# EAGLE board POVRotor (EAGLE 9.5.1)
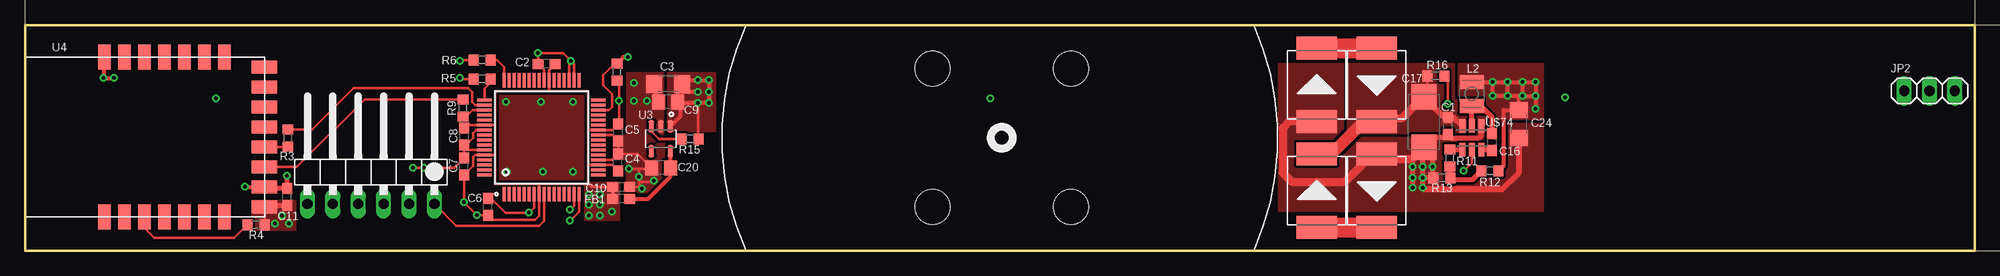
[diagram p0: board, top side]
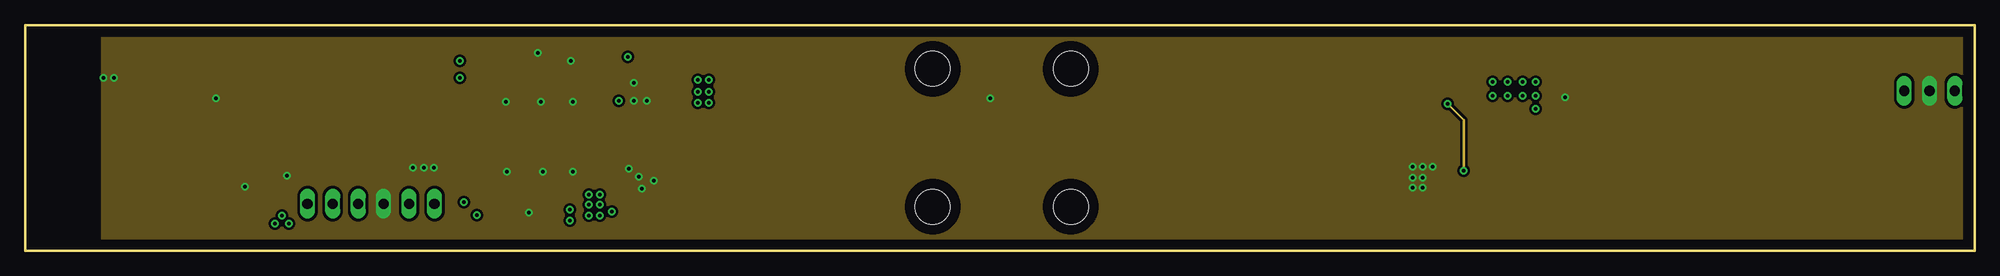
[diagram p1: board, inner layer GND]
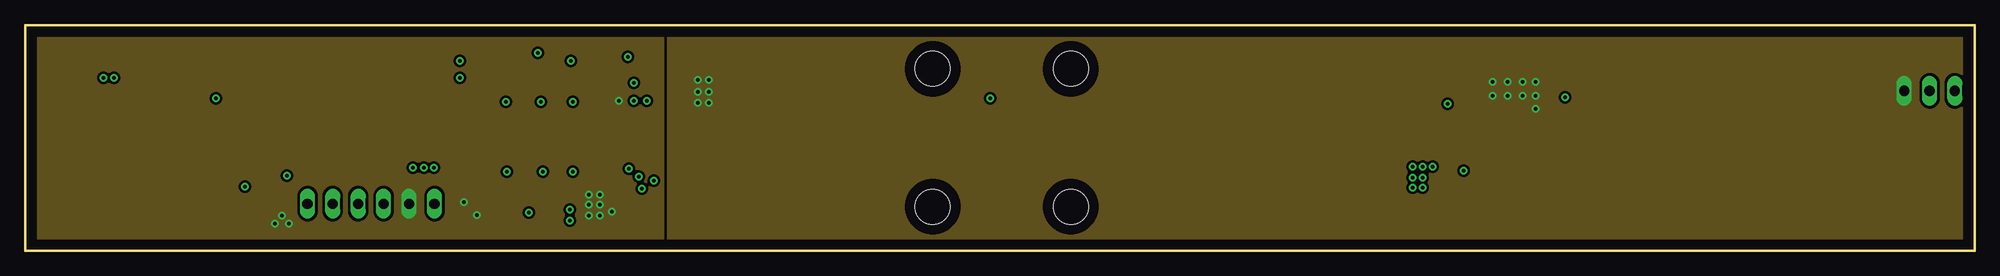
[diagram p2: board, inner layer 5V]
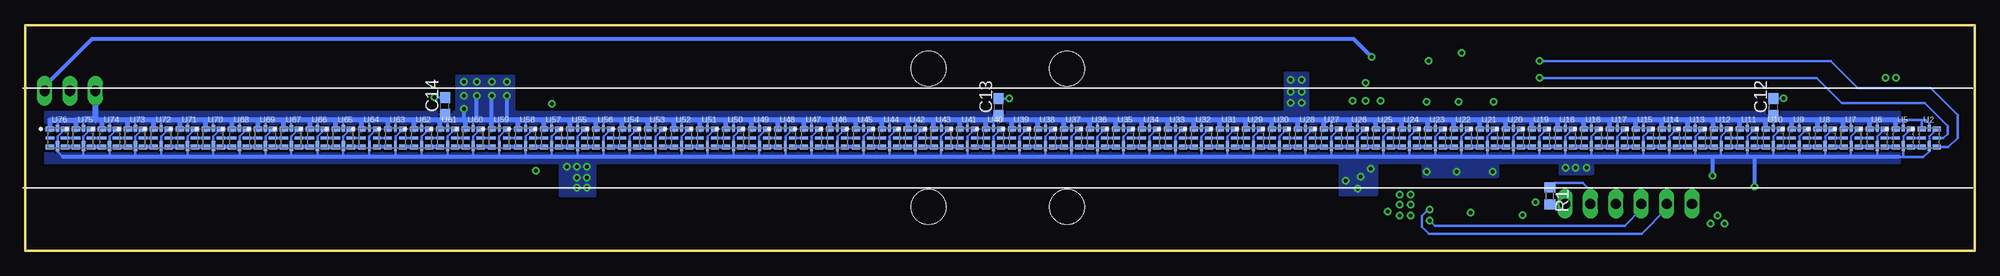
[diagram p3: board, bottom side, seen from below]

Size 195 x 22.6 mm. Coordinates in mm from the lower left corner, seen from the top.
Outline: 0,22.6 195,22.6 195,0 0,0 0,22.6
Copper layers (1+2*15+16): Top 0.035mm / dielectric 1.5mm / GND 0.035mm / dielectric 0.15mm / 5V 0.035mm / dielectric 0.2mm / Bottom 0.035mm
Design rules "default *": minimum track width 0.1mm, minimum drill 12mil, track to track 4mil, track to pad 4mil, pad to pad 4mil, via to via 4mil, smd to smd 4mil, copper to edge 40mil, drill to drill 8mil, minimum pad ring 10mil, minimum via ring 8mil, stop-mask expansion 4mil, vias tented up to drill 0mil, thermal gap 10mil
Holes 3.51 mm at 104.61,18.21 90.79,4.39 104.61,4.39 90.79,18.21

## Footprints (pad centres in the part's own frame; a part is rotated, then mirrored left to right if it is on the bottom)
C0603 = smd 1.1 x 1: 1 -0.85,0; 2 0.85,0
C1206 = smd 1.6 x 1.8: 1 -1.4,0; 2 1.4,0
C0805 = smd 1.3 x 1.5: 1 -0.95,0; 2 0.95,0
C/6032-28R = smd 2.55 x 2.5: + 2.525,0; - -2.525,0
DO-214AB = smd 2.286 x 4.064: 1 -3.683,0; 2 3.683,0
0603 = smd 1.1 x 1: 1 -0.85,0; 2 0.85,0
1X06/90 = drill 1.016 long: 1 -6.35,-3.81; 2 -3.81,-3.81; 3 -1.27,-3.81; 4 1.27,-3.81; 5 3.81,-3.81; 6 6.35,-3.81
1X03 = drill 1.016 long: 1 -2.54,0; 2 0,0; 3 2.54,0
L2825P = smd 1.4 x 2.4: 1 -1.2,0; 2 1.2,0
R0603 = smd 1 x 1.1: 1 -0.85,0; 2 0.85,0
QFP50P1200X1200X120-64N = smd 1.45 x 0.3: 1 -5.7,3.75; 2 -5.7,3.25; 3 -5.7,2.75; 4 -5.7,2.25; 5 -5.7,1.75; 6 -5.7,1.25; 7 -5.7,0.75; 8 -5.7,0.25; 9 -5.7,-0.25; 10 -5.7,-0.75; 11 -5.7,-1.25; 12 -5.7,-1.75; 13 -5.7,-2.25; 14 -5.7,-2.75; 15 -5.7,-3.25; 16 -5.7,-3.75; 33 5.7,-3.75; 34 5.7,-3.25; 35 5.7,-2.75; 36 5.7,-2.25; 37 5.7,-1.75; 38 5.7,-1.25; 39 5.7,-0.75; 40 5.7,-0.25; 41 5.7,0.25; 42 5.7,0.75; 43 5.7,1.25; 44 5.7,1.75; 45 5.7,2.25; 46 5.7,2.75; 47 5.7,3.25; 48 5.7,3.75 | smd 0.3 x 1.45: 17 -3.75,-5.7; 18 -3.25,-5.7; 19 -2.75,-5.7; 20 -2.25,-5.7; 21 -1.75,-5.7; 22 -1.25,-5.7; 23 -0.75,-5.7; 24 -0.25,-5.7; 25 0.25,-5.7; 26 0.75,-5.7; 27 1.25,-5.7; 28 1.75,-5.7; 29 2.25,-5.7; 30 2.75,-5.7; 31 3.25,-5.7; 32 3.75,-5.7; 49 3.75,5.7; 50 3.25,5.7; 51 2.75,5.7; 52 2.25,5.7; 53 1.75,5.7; 54 1.25,5.7; 55 0.75,5.7; 56 0.25,5.7; 57 -0.25,5.7; 58 -0.75,5.7; 59 -1.25,5.7; 60 -1.75,5.7; 61 -2.25,5.7; 62 -2.75,5.7; 63 -3.25,5.7; 64 -3.75,5.7
LED_3341 = smd 0.8 x 0.5: 1 -0.75,0.9; 3 -0.75,-0.9; 4 0.75,-0.9; 6 0.75,0.9 | smd 0.8 x 0.3: 2 -0.75,0; 5 0.75,0 | smd 0.3 x 1: 7 0,-0.83 | smd 0.3 x 0.66: 8 0,0.965
SOT95P280X145-5N = smd 1.21 x 0.59: 1 -1.255,0.95; 2 -1.255,0; 3 -1.255,-0.95; 4 1.255,-0.95; 5 1.255,0.95
EMB1061 = smd 2.54 x 1.27: P$1 -7.62,5.84; P$2 -7.62,3.84; P$3 -7.62,1.84; P$4 -7.62,-0.16; P$5 -7.62,-2.16; P$6 -7.62,-4.16; P$7 -7.62,-6.16; P$16 8.38,-6.16; P$17 8.38,-4.16; P$18 8.38,-2.16; P$19 8.38,-0.16; P$20 8.38,1.84; P$21 8.38,3.84; P$22 8.38,5.84 | smd 1.27 x 2.54: P$8 -6.62,-10.16; P$9 -4.62,-10.16; P$10 -2.62,-10.16; P$11 -0.62,-10.16; P$12 1.38,-10.16; P$13 3.38,-10.16; P$14 5.38,-10.16; P$15 7.38,-10.16
SOT95P280X140-6N = smd 1.35 x 0.6: 1 -1.185,0.95; 2 -1.185,0; 3 -1.185,-0.95; 4 1.185,-0.95; 5 1.185,0; 6 1.185,0.95

## Placement (x,y rotation side)
C1  0.1uF  [C0603]  142.3,12.5 270 top
C2  0.1uF  [C0603]  52.15,18.7 180 top
C3  10uF  [C1206]  64.3,16.7 180 top
C4  0.1uF  [C0603]  59.3,8.85 90 top
C5  0.1uF  [C0603]  59.3,11.85 270 top
C6  0.1uF  [C0603]  46.3,4.4 90 top
C7  0.1uF  [C0603]  43.9,8.45 90 top
C8  0.1uF  [C0603]  43.9,11.45 270 top
C9  [C0805]  64.3,14.9 180 top
C10  0.1uF  [C0603]  59.6,6.4 0 top
C11  0.1uF  [C0603]  26.2,5.4 90 top
C12  0.1uF  [C0603]  20.1,14.4 90 bottom
C13  0.1uF  [C0603]  97.6,14.4 90 bottom
C14  0.1uF  [C0603]  153,14.5 90 bottom
C16  0.1uF  [C0603]  146.7,10.9 270 top
C17  [C/6032-28R]  139.9,12.9 90 top
C20  1uF  [C0805]  63.6,8.3 180 top
C24  10uF  [C1206]  149.4,12.7 270 top
D2  SMD-DIODE-SCHOTTKY-40V-3A(DO-214AB)  [DO-214AB]  129.2,6 90 top
D3  SMD-DIODE-SCHOTTKY-40V-3A(DO-214AB)  [DO-214AB]  135.2,16.6 270 top
D4  SMD-DIODE-SCHOTTKY-40V-3A(DO-214AB)  [DO-214AB]  129.2,16.6 90 top
D5  SMD-DIODE-SCHOTTKY-40V-3A(DO-214AB)  [DO-214AB]  135.2,6 270 top
FB1  30Ω/1.8A  [0603]  59.6,5.2 180 top
JP1  [1X06/90]  34.6,8.5 0 top
JP2  [1X03]  190.5,16 0 top
L2  4.7uH  [L2825P]  144.7,15.7 270 top
R1  [R0603]  42.5,5.5 270 bottom
R2  [R0603]  59.2,17.9 90 top
R3  [R0603]  26.3,11.3 270 top
R4  [R0603]  23.1,2.6 180 top
R5  [R0603]  45.7,17.2 180 top
R6  [R0603]  45.7,19.1 180 top
R9  [R0603]  43.8,14.3 90 top
R11  75k  [R0603]  142.5,9.3 270 top
R12  41k  [R0603]  146.5,8 0 top
R13  7.6k  [R0603]  141.7,7.3 0 top
R15  75k  [R0603]  66.5,11.2 180 top
R16  20k  [R0603]  141.1,17.5 180 top
U1  PIC32MZ2048EFH064-I/PT  [QFP50P1200X1200X120-64N]  51.65,11.35 90 top
U2  3341  [LED_3341]  4.55,11.3 0 bottom
U3  TLV75533PDBVR  [SOT95P280X145-5N]  63.6,11.2 270 top
U4  EMB1061  [EMB1061]  13.8,11 90 top
U5  3341  [LED_3341]  7.15,11.3 0 bottom
U6  3341  [LED_3341]  9.75,11.3 0 bottom
U7  3341  [LED_3341]  12.35,11.3 0 bottom
U8  3341  [LED_3341]  14.95,11.3 0 bottom
U9  3341  [LED_3341]  17.55,11.3 0 bottom
U10  3341  [LED_3341]  20.15,11.3 0 bottom
U11  3341  [LED_3341]  22.75,11.3 0 bottom
U12  3341  [LED_3341]  25.35,11.3 0 bottom
U13  3341  [LED_3341]  27.95,11.3 0 bottom
U14  3341  [LED_3341]  30.55,11.3 0 bottom
U15  3341  [LED_3341]  33.15,11.3 0 bottom
U16  3341  [LED_3341]  38.35,11.3 0 bottom
U17  3341  [LED_3341]  35.75,11.3 0 bottom
U18  3341  [LED_3341]  40.95,11.3 0 bottom
U19  3341  [LED_3341]  43.55,11.3 0 bottom
U20  3341  [LED_3341]  46.15,11.3 0 bottom
U21  3341  [LED_3341]  48.75,11.3 0 bottom
U22  3341  [LED_3341]  51.35,11.3 0 bottom
U23  3341  [LED_3341]  53.95,11.3 0 bottom
U24  3341  [LED_3341]  56.55,11.3 0 bottom
U25  3341  [LED_3341]  59.15,11.3 0 bottom
U26  3341  [LED_3341]  61.75,11.3 0 bottom
U27  3341  [LED_3341]  64.35,11.3 0 bottom
U28  3341  [LED_3341]  66.95,11.3 0 bottom
U29  3341  [LED_3341]  72.15,11.3 0 bottom
U30  3341  [LED_3341]  69.55,11.3 0 bottom
U31  3341  [LED_3341]  74.75,11.3 0 bottom
U32  3341  [LED_3341]  77.35,11.3 0 bottom
U33  3341  [LED_3341]  79.95,11.3 0 bottom
U34  3341  [LED_3341]  82.55,11.3 0 bottom
U35  3341  [LED_3341]  85.15,11.3 0 bottom
U36  3341  [LED_3341]  87.75,11.3 0 bottom
U37  3341  [LED_3341]  90.35,11.3 0 bottom
U38  3341  [LED_3341]  92.95,11.3 0 bottom
U39  3341  [LED_3341]  95.55,11.3 0 bottom
U40  3341  [LED_3341]  98.15,11.3 0 bottom
U41  3341  [LED_3341]  100.75,11.3 0 bottom
U42  3341  [LED_3341]  105.95,11.3 0 bottom
U43  3341  [LED_3341]  103.35,11.3 0 bottom
U44  3341  [LED_3341]  108.55,11.3 0 bottom
U45  3341  [LED_3341]  111.15,11.3 0 bottom
U46  3341  [LED_3341]  113.75,11.3 0 bottom
U47  3341  [LED_3341]  116.35,11.3 0 bottom
U48  3341  [LED_3341]  118.95,11.3 0 bottom
U49  3341  [LED_3341]  121.55,11.3 0 bottom
U50  3341  [LED_3341]  124.15,11.3 0 bottom
U51  3341  [LED_3341]  126.75,11.3 0 bottom
U52  3341  [LED_3341]  129.35,11.3 0 bottom
U53  3341  [LED_3341]  131.95,11.3 0 bottom
U54  3341  [LED_3341]  134.55,11.3 0 bottom
U55  3341  [LED_3341]  139.75,11.3 0 bottom
U56  3341  [LED_3341]  137.15,11.3 0 bottom
U57  3341  [LED_3341]  142.35,11.3 0 bottom
U58  3341  [LED_3341]  144.95,11.3 0 bottom
U59  3341  [LED_3341]  147.55,11.3 0 bottom
U60  3341  [LED_3341]  150.15,11.3 0 bottom
U61  3341  [LED_3341]  152.75,11.3 0 bottom
U62  3341  [LED_3341]  155.35,11.3 0 bottom
U63  3341  [LED_3341]  157.95,11.3 0 bottom
U64  3341  [LED_3341]  160.55,11.3 0 bottom
U65  3341  [LED_3341]  163.15,11.3 0 bottom
U66  3341  [LED_3341]  165.75,11.3 0 bottom
U67  3341  [LED_3341]  168.35,11.3 0 bottom
U68  3341  [LED_3341]  173.55,11.3 0 bottom
U69  3341  [LED_3341]  170.95,11.3 0 bottom
U70  3341  [LED_3341]  176.15,11.3 0 bottom
U71  3341  [LED_3341]  178.75,11.3 0 bottom
U72  3341  [LED_3341]  181.35,11.3 0 bottom
U73  3341  [LED_3341]  183.95,11.3 0 bottom
U74  3341  [LED_3341]  186.55,11.3 0 bottom
U75  3341  [LED_3341]  189.15,11.3 0 bottom
U76  3341  [LED_3341]  191.75,11.3 0 bottom
U$74  AP65211A  [SOT95P280X140-6N]  144.7,11.3 270 top

## Library data of the parts
C1-C8 C10-C14 C16 C17 C20 C24 = rcl; SPICEPREFIX: C
C9 R1-R6 R9 = resistor
D2-D5 = SMD-DIODE-SCHOTTKY-40V-3A_DO-214AB_; AVAILABILITY: Good; DESCRIPTION: Rectifier%2C Schottky%3B DO-214AB%3B 3.0A IF%3B 0.75V%3B 40V%3B 100A IFRM%3B 10000V/us%3B 1000pF; MF: Vishay; MP: SS34-E3/57T; PACKAGE: DO-214 Vishay; PRICE: 0.24 USD
FB1 = SparkFun-Coils; PROD_ID: NDUC-07859
JP1 JP2 = pinhead
L2 = rcl; SPICEPREFIX: L
R11-R13 R15 R16 = rcl; SPICEPREFIX: R
U1 = PIC32MZ2048EFH064-I_PT; AVAILABILITY: Good; DESCRIPTION: PIC32MZ Series 2 MB Flash 512 kB RAM 200 MHz 32-Bit Microcontroller - TQFP-64; MF: Microchip; MP: PIC32MZ2048EFH064-I/PT; PACKAGE: TQFP-64 Microchip; PRICE: 11.29 USD
U2 U5-U76 = APA102; AVAILABILITY: Unavailable; DESCRIPTION: APA102-2020-256-8 is a type ic for the three-color RGB Diming control strip and string.; MF: Adafruit Industries; MP: APA-102-2020-256-8; PACKAGE: SOIC-20 Adafruit Industries; PRICE: None
U3 = TLV75533PDBVR; AVAILABILITY: Unavailable; DESCRIPTION: 500mA Low-IQ Small-Size Low-Dropout _LDO_ Regulator 5-SOT-23 -40 to 125; MF: Texas Instruments; MP: TLV75533PDBVR; PACKAGE: SOT-23 Texas Instruments; PRICE: None
U4 = EMB1061; AVAILABILITY: Unavailable; DESCRIPTION: u-Blox M8 Gnss Antenna Module; MF: U-Blox America; MP: SAM-M8Q; PACKAGE: SMD-20 U-Blox America; PRICE: None
U$74 = SOT95P280X140-6N

## Nets
+3V3: C2.1 C4.1 C5.1 C6.1 C7.1 C8.1 C10.1 C11.1 FB1.2 JP1.5 R1.1 R2.1 R4.1 U1.8 U1.19 U1.26 U1.39 U1.54 U1.60 U4.P$8
+5V: C3.1 C9.1 C12.1 C13.1 C14.1 C24.1 JP2.1 L2.1 R12.2 R15.1 U2.1 U2.8 U3.1 U5.1 U5.8 U6.1 U6.8 U7.1 U7.8 U8.1 U8.8 U9.1 U9.8 U10.1 U10.8 U11.1 U11.8 U12.1 U12.8 U13.1 U13.8 U14.1 U14.8 U15.1 U15.8 U16.1 U16.8 U17.1 U17.8 U18.1 U18.8 U19.1 U19.8 U20.1 U20.8 U21.1 U21.8 U22.1 U22.8 U23.1 U23.8 U24.1 U24.8 U25.1 U25.8 U26.1 U26.8 U27.1 U27.8 U28.1 U28.8 U29.1 U29.8 U30.1 U30.8 U31.1 U31.8 U32.1 U32.8 U33.1 U33.8 U34.1 U34.8 U35.1 U35.8 U36.1 U36.8 U37.1 U37.8 U38.1 U38.8 U39.1 U39.8 U40.1 U40.8 U41.1 U41.8 U42.1 U42.8 U43.1 U43.8 U44.1 U44.8 U45.1 U45.8 U46.1 U46.8 U47.1 U47.8 U48.1 U48.8 U49.1 U49.8 U50.1 U50.8 U51.1 U51.8 U52.1 U52.8 U53.1 U53.8 U54.1 U54.8 U55.1 U55.8 U56.1 U56.8 U57.1 U57.8 U58.1 U58.8 U59.1 U59.8 U60.1 U60.8 U61.1 U61.8 U62.1 U62.8 U63.1 U63.8 U64.1 U64.8 U65.1 U65.8 U66.1 U66.8 U67.1 U67.8 U68.1 U68.8 U69.1 U69.8 U70.1 U70.8 U71.1 U71.8 U72.1 U72.8 U73.1 U73.8 U74.1 U74.8 U75.1 U75.8 U76.1 U76.8
+15V: C1.1 C17.+ D2.2 D3.2 R16.2 U$74.3
BLE_RX: R3.2 U4.P$11
BLE_TX: R9.2 U4.P$10
CKI_1: R5.2 U2.5
GND: C1.2 C2.2 C3.2 C4.2 C5.2 C6.2 C7.2 C8.2 C9.2 C10.2 C11.2 C12.2 C13.2 C14.2 C17.- C20.2 C24.2 D4.1 D5.1 JP1.4 JP2.2 R13.1 U1.7 U1.20 U1.25 U1.34 U1.35 U1.40 U1.55 U1.59 U2.6 U2.7 U3.2 U4.P$9 U4.P$22 U5.6 U5.7 U6.6 U6.7 U7.6 U7.7 U8.6 U8.7 U9.6 U9.7 U10.6 U10.7 U11.6 U11.7 U12.6 U12.7 U13.6 U13.7 U14.6 U14.7 U15.6 U15.7 U16.6 U16.7 U17.6 U17.7 U18.6 U18.7 U19.6 U19.7 U20.6 U20.7 U21.6 U21.7 U22.6 U22.7 U23.6 U23.7 U24.6 U24.7 U25.6 U25.7 U26.6 U26.7 U27.6 U27.7 U28.6 U28.7 U29.6 U29.7 U30.6 U30.7 U31.6 U31.7 U32.6 U32.7 U33.6 U33.7 U34.6 U34.7 U35.6 U35.7 U36.6 U36.7 U37.6 U37.7 U38.6 U38.7 U39.6 U39.7 U40.6 U40.7 U41.6 U41.7 U42.6 U42.7 U43.6 U43.7 U44.6 U44.7 U45.6 U45.7 U46.6 U46.7 U47.6 U47.7 U48.6 U48.7 U49.6 U49.7 U50.6 U50.7 U51.6 U51.7 U52.6 U52.7 U53.6 U53.7 U54.6 U54.7 U55.6 U55.7 U56.6 U56.7 U57.6 U57.7 U58.6 U58.7 U59.6 U59.7 U60.6 U60.7 U61.6 U61.7 U62.6 U62.7 U63.6 U63.7 U64.6 U64.7 U65.6 U65.7 U66.6 U66.7 U67.6 U67.7 U68.6 U68.7 U69.6 U69.7 U70.6 U70.7 U71.6 U71.7 U72.6 U72.7 U73.6 U73.7 U74.6 U74.7 U75.6 U75.7 U76.6 U76.7 U$74.1
N$1: D2.1 D5.2
N$2: D3.1 D4.2
N$3: R15.2 U3.3
N$4: R9.1 U1.51
N$5: R4.2 U4.P$3
N$6: R16.1 U$74.5
N$7: U5.2 U6.5
N$8: U5.3 U6.4
N$9: U2.2 U5.5
N$10: U2.3 U5.4
N$11: U6.2 U7.5
N$12: JP1.3 U1.16
N$13: JP1.2 U1.15
N$14: JP1.6 R1.2 U1.9
N$15: U26.2 U27.5
N$16: U6.3 U7.4
N$17: U7.2 U8.5
N$18: U7.3 U8.4
N$19: R3.1 U1.50
N$20: U8.2 U9.5
N$21: R6.1 U1.48
N$24: U8.3 U9.4
N$25: U9.2 U10.5
N$27: U9.3 U10.4
N$28: U10.2 U11.5
N$29: U10.3 U11.4
N$30: U11.2 U12.5
N$31: U11.3 U12.4
N$32: U12.2 U13.5
N$33: U12.3 U13.4
N$34: U13.2 U14.5
N$35: U13.3 U14.4
N$36: U14.2 U15.5
N$37: U14.3 U15.4
N$38: U15.2 U17.5
N$39: U15.3 U17.4
N$40: U16.5 U17.2
N$41: U16.4 U17.3
N$42: U18.2 U19.5
N$43: U18.3 U19.4
N$44: U16.2 U18.5
N$45: R5.1 U1.49
N$46: U16.3 U18.4
N$47: U19.2 U20.5
N$48: U19.3 U20.4
N$49: U20.2 U21.5
N$50: JP2.3 R2.2 U1.30
N$51: U20.3 U21.4
N$52: U21.2 U22.5
N$53: U21.3 U22.4
N$54: U22.2 U23.5
N$55: U22.3 U23.4
N$56: U23.2 U24.5
N$57: U23.3 U24.4
N$58: U24.2 U25.5
N$59: U24.3 U25.4
N$60: U25.2 U26.5
N$61: U25.3 U26.4
N$62: C20.1 FB1.1 U3.5
N$63: U26.3 U27.4
N$64: U27.2 U28.5
N$65: U27.3 U28.4
N$66: U28.2 U30.5
N$67: U28.3 U30.4
N$68: U29.5 U30.2
N$69: U29.4 U30.3
N$70: U31.2 U32.5
N$71: U31.3 U32.4
N$72: U29.2 U31.5
N$73: U29.3 U31.4
N$74: U32.2 U33.5
N$75: U32.3 U33.4
N$76: U33.2 U34.5
N$77: U33.3 U34.4
N$78: U34.2 U35.5
N$79: U34.3 U35.4
N$80: U35.2 U36.5
N$81: U35.3 U36.4
N$82: U36.2 U37.5
N$83: U36.3 U37.4
N$84: U37.2 U38.5
N$85: U37.3 U38.4
N$86: U38.2 U39.5
N$87: U38.3 U39.4
N$88: U39.2 U40.5
N$89: U39.3 U40.4
N$90: U40.2 U41.5
N$91: U40.3 U41.4
N$92: U1.23
N$93: U41.2 U43.5
N$94: U41.3 U43.4
N$95: U42.5 U43.2
N$96: U42.4 U43.3
N$97: U44.2 U45.5
N$98: U44.3 U45.4
N$99: U42.2 U44.5
N$100: U42.3 U44.4
N$101: U45.2 U46.5
N$102: U45.3 U46.4
N$103: U46.2 U47.5
N$104: U46.3 U47.4
N$105: U47.2 U48.5
N$106: U47.3 U48.4
N$107: U48.2 U49.5
N$108: U48.3 U49.4
N$109: U49.2 U50.5
N$110: U49.3 U50.4
N$111: U50.2 U51.5
N$113: U50.3 U51.4
N$114: U51.2 U52.5
N$115: U51.3 U52.4
N$116: U52.2 U53.5
N$117: U52.3 U53.4
N$118: U53.2 U54.5
N$119: U53.3 U54.4
N$120: U54.2 U56.5
N$121: U54.3 U56.4
N$122: U55.5 U56.2
N$123: U55.4 U56.3
N$124: U57.2 U58.5
N$125: U57.3 U58.4
N$126: U55.2 U57.5
N$127: U55.3 U57.4
N$128: U58.2 U59.5
N$129: C16.1 L2.2 U$74.2
N$130: C16.2 U$74.6
N$131: U58.3 U59.4
N$132: U59.2 U60.5
N$133: U59.3 U60.4
N$134: U60.2 U61.5
N$135: U60.3 U61.4
N$136: U61.2 U62.5
N$137: U61.3 U62.4
N$138: U62.2 U63.5
N$139: U62.3 U63.4
N$140: U63.2 U64.5
N$141: U63.3 U64.4
N$142: U64.2 U65.5
N$143: U64.3 U65.4
N$144: U65.2 U66.5
N$145: U65.3 U66.4
N$146: U66.2 U67.5
N$147: U66.3 U67.4
N$148: U67.2 U69.5
N$149: U67.3 U69.4
N$150: U68.5 U69.2
N$151: U68.4 U69.3
N$152: U70.2 U71.5
N$153: U70.3 U71.4
N$154: U68.2 U70.5
N$155: U68.3 U70.4
N$156: U71.2 U72.5
N$157: U71.3 U72.4
N$158: U72.2 U73.5
N$159: U72.3 U73.4
N$160: U73.2 U74.5
N$161: U73.3 U74.4
N$162: U74.2 U75.5
N$163: U74.3 U75.4
N$164: U75.2 U76.5
N$165: U75.3 U76.4
N$167: R11.1 U$74.4
N$168: R11.2 R12.1 R13.2
SDI_1: R6.2 U2.4
VBUS: U1.33

## Tracks (layer width: path | path; a pad name or v marks a point on that pad's centre or on a via)
+3V3  (via drill 0.35)
  Top 0.254: 56.3,6.7 56.3,8.6 | 56.3,8.6 56.3,12.1 | 56.3,12.1 56.3,16 52.4,16 | 52.4,16 47,16 47,12.6 | 47,12.6 47,9.6 | 47,9.6 47,6.7 51.4,6.7 | 51.4,6.7 56.3,6.7 | 45.7,9.6 U1.60 | C8.1 44.2,12.6 U1.54 47,12.6 | 47,9.6 U1.60 | 51.4,6.7 U1.8 51.4,3.5 51,3.1 46.75,3.1 C6.1 v45.2,3.55 v43.9,4.85 C7.1 44.8,8.5 44.8,9.4 45,9.6 U1.60 | 56.3,12.1 U1.26 58.7,12.1 C5.1 | 56.3,8.6 U1.19 58.7,8.6 C4.1 | 52.4,16 U1.39 52.4,18.1 C2.1 | C5.1 59.4,12.8 v59.4,15 59.4,16.85 R2.1 | R4.1 U4.P$8 | 59.2,12.8 C5.1 | C10.1 56.6,6.4 56.3,6.7
  Top 0.406: C10.1 FB1.2
  Top 0.508: 24.56,4.38 U4.P$8 24.13,4.55 C11.1
  Bottom 0.254: R1.1 42.05,6.8 39.2,6.8 38.41,6.01 JP1.5
  other vias: 56.4,5.6 57.5,5.6 56.4,4.6 57.5,4.6 56.4,3.5 57.5,3.5 58.7,3.9 25,2.7 26.4,2.7 25.7,3.5
  pour 5V (isolate 0.254, rank 2, no thermals): 0,22.6 64.3,22.6 64.3,0 0,0
  pour Top (isolate 0.254, rank 2, no thermals): 56,6.8 59.4,6.8 59.4,3.1 56,3.1
  pour Top (isolate 0.254, no thermals): 22.8,5 27,5 27,2.1 22.8,2.1
+5V  (via drill 0.35)
  Top 0.254: R15.1 67.3,11.25 v67.3,14.8
  Top 0.406: R12.2 147.4,8 147.9,8.5 147.9,14.1 C24.1 149.4,15.5 | L2.1 v146.8,16.9 | v146.8,16.9 v148.3,16.9 | v148.3,16.9 v149.8,16.9 | v149.8,16.9 v151.1,16.9 v151.1,15.5 | v151.1,15.5 v151.1,14.2 | v149.8,15.5 149.4,15.5 | 149.4,15.5 v148.3,15.5 | v148.3,15.5 v146.8,15.5 v146.8,16.9 | v149.8,15.5 v151.1,15.5 | v149.8,15.5 v149.8,16.9 | v148.3,15.5 v148.3,16.9 | U3.1 65.55,13.46 65.55,14.8 | 65.7,15.9 C3.1 65.7,17.1 v67.3,17.1 v68.4,17.1 v68.4,15.9 v68.4,14.8 v67.3,14.8 65.55,14.8 | 65.55,14.8 65.25,14.8 C9.1 65.3,14.95 65.3,15.9 65.7,15.9 | v67.3,15.9 65.7,15.9
  Bottom 0.254: U5.8 7.15,13.1 | U6.8 9.75,13.1 9.8,13.1 | U7.8 12.35,13.1 12.3,13.1 | U8.8 14.95,13.1 14.9,13.1 | U9.8 17.55,13.1 17.7,13.1 | U10.8 20.15,13.1 20.3,13.1 | U11.8 22.75,13.1 22.6,13.1 | U12.8 25.35,13.1 25.5,13.1 | U13.8 27.95,13.1 28,13.1 | U14.8 30.55,13.1 30.6,13.1 | U15.8 33.15,13.1 33.2,13.1 | U17.8 35.75,13.1 35.8,13.1 | U16.8 38.35,13.1 38.3,13.1 | U18.8 40.95,13.1 41,13.1 | U19.8 43.55,13.1 43.6,13.1 | U20.8 46.15,13.1 46.1,13.1 | U21.8 48.75,13.1 48.6,13.1 | U22.8 51.35,13.1 51.3,13.1 | U23.8 53.95,13.1 54.2,13.1 | U24.8 56.55,13.1 56.7,13.1 | U25.8 59.15,13.1 59.4,13.1 | U26.8 61.75,13.1 61.7,13.1 | U27.8 64.35,13.1 64.3,13.1 | U28.8 66.95,13.1 67.1,13.1 | U30.8 69.55,13.1 69.6,13.1 | U29.8 72.15,13.1 72.2,13.1 | U31.8 74.75,13.1 74.9,13.1 | U32.8 77.35,13.1 77.3,13.1 | U33.8 79.95,13.1 80,13.1 | U34.8 82.55,13.1 82.6,13.1 | U35.8 85.15,13.1 85.2,13.1 | U36.8 87.75,13.1 87.8,13.1 | U37.8 90.35,13.1 90.4,13.1 | U38.8 92.95,13.1 93.1,13.1 | U39.8 95.55,13.1 95.5,13.1 | U40.8 98.15,13.1 98.4,13.1 | U41.8 100.75,13.1 100.8,13.1 | U43.8 103.35,13.1 103.6,13.1 | U42.8 105.95,13.1 106,13.1 | U44.8 108.55,13.1 108.4,13.1 | U45.8 111.15,13.1 111.1,13.1 | U46.8 113.75,13.1 113.8,13.1 | U47.8 116.35,13.1 116.2,13.1 | U48.8 118.95,13.1 119,13.1 | U49.8 121.55,13.1 121.6,13.1 | U50.8 124.15,13.1 124.2,13.1 | U51.8 126.75,13.1 126.6,13.1 | U52.8 129.35,13.1 129.3,13.1 | U53.8 131.95,13.1 132,13.1 | U54.8 134.55,13.1 134.7,13.1 | U56.8 137.15,13.1 137.3,13.1 | U55.8 139.75,13.1 139.7,13.1 | U57.8 142.35,13.1 142.3,13.1 | U58.8 144.95,13.1 145.1,13.1 | U59.8 147.55,13.1 147.6,13.1 | U60.8 150.15,13.1 150.1,13.1 | U61.8 152.75,13.1 152.9,13.1 | U62.8 155.35,13.1 155.4,13.1
  Bottom 0.254: U63.8 157.95,13.1 158.1,13.1 | U64.8 160.55,13.1 160.5,13.1 | U65.8 163.15,13.1 163.2,13.1 | U66.8 165.75,13.1 165.7,13.1 | U67.8 168.35,13.1 168.4,13.1 | U69.8 170.95,13.1 171,13.1 | U68.8 173.55,13.1 173.9,13.1 | U70.8 176.15,13.1 176.2,13.1 | U71.8 178.75,13.1 179,13.1 | U72.8 181.35,13.1 181.4,13.1 | U73.8 183.95,13.1 184.2,13.1 | U74.8 186.55,13.1 186.6,13.1 | U75.8 189.15,13.1 189.2,13.1 | U76.8 191.75,13.1 192,13.1 | 7.15,13.1 7.9,13.1 | 7.15,13.1 5.3,13.1 | 5.3,13.1 4.9,13.1 4.55,12.75 U2.8 | U2.1 5.3,13.1
  Bottom 0.406: v146.8,15.5 146.8,13.1 | 151.2,13.1 151.1,13.2 v151.1,14.2 | 148.3,13.1 v148.3,15.5 | 149.8,13.1 v149.8,15.5
  Bottom 0.508: U76.1 192.5,13.1 192,13.1 189.9,13.1 | 189.9,13.1 U75.1 | U74.1 187.3,13.1 | 187.3,13.1 187.9,13.1 189.2,13.1 189.9,13.1 | U73.1 184.7,13.1 | 184.7,13.1 186.6,13.1 187.3,13.1 | U72.1 182.1,13.1 | 182.1,13.1 184.2,13.1 184.7,13.1 | U71.1 179.5,13.1 | 179.5,13.1 181.4,13.1 182.1,13.1 | U70.1 176.9,13.1 | 176.9,13.1 179,13.1 179.5,13.1 | U68.1 174.3,13.1 | 174.3,13.1 176.2,13.1 176.9,13.1 | U69.1 171.7,13.1 | 171.7,13.1 173.9,13.1 174.3,13.1 | U67.1 169.1,13.1 | 169.1,13.1 171,13.1 171.7,13.1 | U66.1 166.5,13.1 | 166.5,13.1 168.4,13.1 169.1,13.1 | U65.1 163.9,13.1 | 163.9,13.1 165.7,13.1 166.5,13.1 | U64.1 161.3,13.1 | 161.3,13.1 163.2,13.1 163.9,13.1 | U63.1 158.7,13.1 | 158.7,13.1 160.5,13.1 161.3,13.1 | U62.1 156.1,13.1 | 156.1,13.1 158.1,13.1 158.7,13.1 | U61.1 153.5,13.1 | 153.5,13.1 155.4,13.1 156.1,13.1 | U60.1 150.9,13.1 | 150.9,13.1 151.2,13.1 152.9,13.1 153.5,13.1 | U59.1 148.3,13.1 | 148.3,13.1 149.8,13.1 150.1,13.1 150.9,13.1 | U58.1 145.7,13.1 | 145.7,13.1 146.8,13.1 147.6,13.1 148.3,13.1 | U57.1 143.1,13.1 | 143.1,13.1 145.1,13.1 145.7,13.1 | U55.1 140.5,13.1 | 140.5,13.1 142.3,13.1 143.1,13.1 | U56.1 137.9,13.1 | 137.9,13.1 139.7,13.1 140.5,13.1 | U54.1 135.3,13.1 | 135.3,13.1 137.3,13.1 137.9,13.1 | U53.1 132.7,13.1 | 132.7,13.1 134.7,13.1 135.3,13.1 | U52.1 130.1,13.1 | 130.1,13.1 132,13.1 132.7,13.1 | U51.1 127.5,13.1 | 127.5,13.1 129.3,13.1 130.1,13.1 | U50.1 124.9,13.1 | 124.9,13.1 126.6,13.1 127.5,13.1 | U49.1 122.3,13.1 | 122.3,13.1 124.2,13.1 124.9,13.1 | U48.1 119.7,13.1 | 119.7,13.1 121.6,13.1 122.3,13.1 | U47.1 117.1,13.1 | 117.1,13.1 119,13.1 119.7,13.1 | U46.1 114.5,13.1 | 114.5,13.1 116.2,13.1 117.1,13.1 | U45.1 111.9,13.1 | 111.9,13.1 113.8,13.1 114.5,13.1
  Bottom 0.508: U44.1 109.3,13.1 | 109.3,13.1 111.1,13.1 111.9,13.1 | U42.1 106.7,13.1 | 106.7,13.1 108.4,13.1 109.3,13.1 | U43.1 104.1,13.1 | 104.1,13.1 106,13.1 106.7,13.1 | U41.1 101.5,13.1 | 101.5,13.1 103.6,13.1 104.1,13.1 | U40.1 98.9,13.1 | 98.9,13.1 100.8,13.1 101.5,13.1 | U39.1 96.3,13.1 | 96.3,13.1 98.4,13.1 98.9,13.1 | U38.1 93.7,13.1 | 93.7,13.1 95.5,13.1 96.3,13.1 | U37.1 91.1,13.1 | 91.1,13.1 93.1,13.1 93.7,13.1 | U36.1 88.5,13.1 | 88.5,13.1 90.4,13.1 91.1,13.1 | U35.1 85.9,13.1 | 85.9,13.1 87.8,13.1 88.5,13.1 | U34.1 83.3,13.1 | 83.3,13.1 85.2,13.1 85.9,13.1 | U33.1 80.7,13.1 | 80.7,13.1 82.6,13.1 83.3,13.1 | U32.1 78.1,13.1 | 78.1,13.1 80,13.1 80.7,13.1 | U31.1 75.5,13.1 | 75.5,13.1 77.3,13.1 78.1,13.1 | U29.1 72.9,13.1 | 72.9,13.1 74.9,13.1 75.5,13.1 | U30.1 70.3,13.1 | 70.3,13.1 72.2,13.1 72.9,13.1 | U28.1 67.7,13.1 | 67.7,13.1 69.6,13.1 70.3,13.1 | U27.1 65.1,13.1 | 65.1,13.1 67.1,13.1 67.7,13.1 | U26.1 62.5,13.1 | 62.5,13.1 64.3,13.1 65.1,13.1 | U25.1 59.9,13.1 | 59.9,13.1 61.7,13.1 62.5,13.1 | U24.1 57.3,13.1 | 57.3,13.1 59.4,13.1 59.9,13.1 | U23.1 54.7,13.1 | 54.7,13.1 56.7,13.1 57.3,13.1 | U22.1 52.1,13.1 | 52.1,13.1 54.2,13.1 54.7,13.1 | U21.1 49.5,13.1 | 49.5,13.1 51.3,13.1 52.1,13.1 | U20.1 46.9,13.1 | 46.9,13.1 48.6,13.1 49.5,13.1 | U19.1 44.3,13.1 | 44.3,13.1 46.1,13.1 46.9,13.1 | U18.1 41.7,13.1 | 41.7,13.1 43.6,13.1 44.3,13.1 | U16.1 39.1,13.1 | 39.1,13.1 41,13.1 41.7,13.1 | U17.1 36.5,13.1 | 36.5,13.1 38.3,13.1 39.1,13.1 | U15.1 33.9,13.1 | 33.9,13.1 35.8,13.1 36.5,13.1 | U14.1 31.3,13.1 | 31.3,13.1 33.2,13.1 33.9,13.1 | U13.1 28.7,13.1 | 28.7,13.1 30.6,13.1 31.3,13.1 | U12.1 26.1,13.1 | 26.1,13.1 28,13.1 28.7,13.1 | U11.1 23.5,13.1 | 23.5,13.1 25.5,13.1 26.1,13.1
  Bottom 0.508: U10.1 20.9,13.1 | 20.9,13.1 22.6,13.1 23.5,13.1 | U9.1 18.3,13.1 | 18.3,13.1 20.3,13.1 20.9,13.1 | U8.1 15.7,13.1 | 15.7,13.1 17.7,13.1 18.3,13.1 | U7.1 13.1,13.1 | 13.1,13.1 14.9,13.1 15.7,13.1 | U6.1 10.5,13.1 | 10.5,13.1 12.3,13.1 13.1,13.1 | U5.1 7.9,13.1 9.8,13.1 10.5,13.1
  Bottom 0.61: JP2.1 187.96,13.1 187.9,13.1
  pour Bottom: 7.5,13.9 7.5,11.9 193,11.9 193,13.9 151.8,13.9 151.8,17.5 146.1,17.5 146.1,13.9 69,13.9 69,17.8 66.7,17.8 66.7,13.9
  pour 5V (isolate 0.254, no thermals): 64.3,22.6 195.2,22.6 195.2,0 64.3,0
  pour Top (isolate 0.254, no thermals): 151.8,18.7 151.8,13.2 143.4,13.2 143.4,18.7
  pour Top (isolate 0.254, no thermals): 64.3,17.8 69,17.8 69,12 64.3,12
+15V
  Top 0.152: 142.4,13.45 C1.1
  Top 0.254: R16.2 140.25,15.15 140.21,15.11 140.06,14.96
  Top 0.61: D3.2 136.78,12.92 | C17.+ 141.88,13.45 142.4,13.45 | C1.1 142.88,13.35 U$74.3
  Top 0.813: D2.2 130.68,9.68 | 133.92,12.92 D3.2 135.58,13.3 137.78,13.3 C17.+ 140.21,15.11
  Top 1.27: 130.68,9.68 133.92,12.92
  pour Top (isolate 0.254, rank 2, no thermals): 132.3,11.8 132.3,18.7 144.2,18.7 144.2,11.8
BLE_RX
  Top 0.254: R3.2 26.23,10.38 U4.P$11
BLE_TX
  Top 0.254: R9.2 33.95,15.15 27.18,8.38 U4.P$10
CKI_1  (via drill 0.35)
  Top 0.254: R5.2 43.6,17.2 v43.5,17.3
  Bottom 0.254: v43.5,17.3 15.8,17.3 13.3,14.8 5,14.8 2.7,12.5 2.7,11.7 3.1,11.3 U2.5
GND  (via drill 0.35)
  Top 0.254: 62.35,8.3 62.6,8.3 | 62.6,8.3 C20.2 61.25,9.7 C4.2 | C10.2 61.4,6.4 | 61.4,6.4 61.7,6.4 v61.7,6.2 | 61.4,6.9 v61.4,7.4 61.4,8.2 | 61.4,6.9 61.4,6.4 | v62.9,7 62.9,6.9 61.4,6.9 | 61.4,8.2 v60.4,8.2 | 61.4,8.2 62.6,8.2 62.6,8.3 | C6.2 46.6,5.25 48.05,3.8 v50.4,3.8 50.9,4.3 U1.7 | 43.9,10.1 C8.2 44.1,10.6 44.8,11.3 44.8,11.8 45.1,12.1 U1.55 | 43.9,10.1 C7.2 42.9,8.3 v40.9,8.3 v39.9,8.3 v38.8,8.3 | C4.2 58.7,9.1 U1.20 | C4.2 C5.2 58.7,11.6 U1.25 | v54.6,19 54.4,18.8 U1.35 | U1.34 54.9,18.7 v54.6,19 | v54.6,19 53.8,19.8 v51.3,19.8 C2.2 51.9,18.1 U1.40 | U1.59 43.9,10.1
  Top 0.406: C3.2 63.05,16.55 63.05,15.2 C9.2 63.6,14.65 | 7.64,20 7.96,19.68 U4.P$22 7.85,19.27 v7.85,17.3 v8.9,17.3 | v22,6.4 23.94,6.4 U4.P$9
  Top 0.508: U$74.1 145.65,11.55 145.35,11.25 142.7,11.25 C1.2 142.05,11.4 140.93,11.4 C17.- 140.85,9.43 | 140.82,10.38 140.8,10.35 v140.8,8.4 140.8,7.35 R13.1 v139.8,7.3 | 139.8,10.28 v139.8,8.4 v139.8,7.3 | v139.8,6.3 v139.8,7.3 | 139.36,9.84 138.8,9.28 v138.8,8.4 v138.8,7.3 v138.8,6.3 | U4.P$9 24.09,6.25 C11.2 v26.2,7.5
  Top 0.61: C24.2 149.4,7.8 147.74,6.14 139.96,6.14 v139.8,6.3 | D4.1 129.92,12.9 | 135.22,9.68 D5.1 134.5,9.68 133.82,9.68 | D4.1 130.58,12.92 | D4.1 130.1,12.92
  Top 0.813: 139.38,10.9 C17.- | 135.58,9.3 D5.1 135.68,9.2 138.72,9.2 139.36,9.84 | D4.1 126.42,12.92 125.8,12.3 125.8,7.8 126.7,6.9 132,6.9 134.5,9.4 134.5,9.68
  Bottom 0.2: U2.6 4.55,11.45 U2.7 | U5.6 7.15,11.45 U5.7 | U6.6 9.75,11.45 U6.7 | U7.6 12.35,11.45 U7.7 | U8.6 14.95,11.45 U8.7 | U9.6 17.55,11.45 U9.7 | U10.6 20.15,11.45 U10.7 | U11.6 22.75,11.45 U11.7 | U12.6 25.35,11.45 U12.7 | U13.6 27.95,11.45 U13.7 | U14.6 30.55,11.45 U14.7
  Bottom 0.254: 191.2,9.4 191.75,9.95 U76.7 191.75,11.45 U76.6 | 189.3,9.4 189.15,9.4 U75.7 189.15,11.45 U75.6 | 187,9.4 186.55,9.4 U74.7 186.55,11.45 U74.6 | 184.3,9.4 183.95,9.4 U73.7 183.95,11.45 U73.6 | 182.2,9.4 181.35,9.4 U72.7 181.35,11.45 U72.6 | 179.1,9.4 178.75,9.4 U71.7 178.75,11.45 U71.6 | 176.5,9.4 176.15,9.4 U70.7 176.15,11.45 U70.6 | 174.4,9.4 173.55,9.4 U68.7 173.55,11.45 U68.6 | 171.3,9.4 170.95,9.4 U69.7 170.95,11.45 U69.6 | 169,9.4 168.35,9.4 U67.7 168.35,11.45 U67.6 | 166.2,9.4 165.75,9.4 U66.7 165.75,11.45 U66.6 | 163.8,9.4 163.15,9.4 U65.7 163.15,11.45 U65.6 | 161.2,9.4 160.55,9.4 U64.7 160.55,11.45 U64.6 | 158.9,9.4 157.95,9.4 U63.7 157.95,11.45 U63.6 | 156.2,9.4 155.35,9.4 U62.7 155.35,11.45 U62.6 | 153.3,9.4 152.75,9.4 U61.7 152.75,11.45 U61.6 | 150.15,9.4 U60.7 150.15,11.45 U60.6 | 148,9.4 147.55,9.4 U59.7 147.55,11.45 U59.6 | 145.7,9.4 144.95,9.4 U58.7 144.95,11.45 U58.6 | 142.7,9.4 142.38,9.4 142.35,9.37 U57.7 142.35,11.45 U57.6 | 140.2,9.4 139.75,9.4 U55.7 139.75,11.45 U55.6 | 138,9.4 137.15,9.4 U56.7 137.15,11.45 U56.6 | 135.3,9.4 134.55,9.4 U54.7 134.55,11.45 U54.6 | 132.7,9.4 131.95,9.4 U53.7 131.95,11.45 U53.6 | 130,9.4 129.35,9.4 U52.7 129.35,11.45 U52.6 | 127.2,9.4 126.75,9.4 U51.7 126.75,11.45 U51.6 | 124,9.4 124.15,9.4 U50.7 124.15,11.45 U50.6 | 121.4,9.4 121.55,9.4 U49.7 121.55,11.45 U49.6 | 118.5,9.4 118.95,9.4 U48.7 118.95,11.45 U48.6 | 116.1,9.4 116.35,9.4 U47.7 116.35,11.45 U47.6 | 113.5,9.4 113.75,9.4 U46.7 113.75,11.45 U46.6 | 110.6,9.4 111.15,9.4 U45.7 111.15,11.45 U45.6 | 109.1,9.4 108.55,9.4 U44.7 108.55,11.45 U44.6 | 105.3,9.4 105.95,9.4 U42.7 105.95,11.45 U42.6
  Bottom 0.254: 103.8,9.4 103.35,9.4 U43.7 103.35,11.45 U43.6 | 101.2,9.4 100.75,9.4 U41.7 100.75,11.45 U41.6 | 97.3,9.4 98.15,9.4 U40.7 98.15,11.45 U40.6 | 95.9,9.4 95.55,9.4 U39.7 95.55,11.45 U39.6 | 92.7,9.4 92.95,9.4 U38.7 92.95,11.45 U38.6 | 89.8,9.4 90.35,9.4 U37.7 90.35,11.45 U37.6 | 87.7,9.4 87.75,9.4 U36.7 87.75,11.45 U36.6 | 85.4,9.4 85.15,9.4 U35.7 85.15,11.45 U35.6 | 81.3,9.4 82.55,9.4 U34.7 82.55,11.45 U34.6 | 79.5,9.4 79.95,9.4 U33.7 79.95,11.45 U33.6 | 77.1,9.4 77.35,9.4 U32.7 77.35,11.45 U32.6 | 75.4,9.4 74.75,9.4 U31.7 74.75,11.45 U31.6 | 71.5,9.4 72.15,9.4 U29.7 72.15,11.45 U29.6 | 69.3,9.4 69.55,9.4 U30.7 69.55,11.45 U30.6 | 66.7,9.4 66.95,9.4 U28.7 66.95,11.45 U28.6 | 64,9.4 64.35,9.4 U27.7 64.35,11.45 U27.6 | 61.2,9.4 61.75,9.4 U26.7 61.75,11.45 U26.6 | 58.5,9.4 59.15,9.4 U25.7 59.15,11.45 U25.6 | 56.1,9.4 56.55,9.4 U24.7 56.55,11.45 U24.6 | 53.6,9.4 53.95,9.4 U23.7 53.95,11.45 U23.6 | 51,9.4 51.35,9.4 U22.7 51.35,11.45 U22.6 | 48.3,9.4 48.75,9.4 U21.7 48.75,11.45 U21.6 | 45.8,9.4 46.15,9.4 U20.7 46.15,11.45 U20.6 | 43.1,9.4 43.55,9.4 U19.7 43.55,11.45 U19.6 | 40.2,9.4 40.95,9.4 U18.7 40.95,11.45 U18.6 | 37.8,9.4 38.35,9.4 U16.7 38.35,11.45 U16.6 | 35.3,9.4 35.75,9.4 U17.7 35.75,11.45 U17.6 | 32.7,9.4 33.15,9.4 U15.7 33.15,11.45 U15.6 | U14.7 30.55,9.4 29.4,9.4 | U13.7 27.95,9.4 27.5,9.4 | U12.7 25.35,9.4 24.7,9.4 | U11.7 22.75,9.4 22.3,9.4 | U10.7 20.15,9.4 19.9,9.4 | U9.7 17.55,9.4 17.2,9.4 | U8.7 14.95,9.4 14.6,9.4 | U7.7 12.35,9.4 11.6,9.4 | U5.7 7.15,9.4 | U2.7 4.55,9.95 5.1,9.4 7.15,9.4 | U6.7 9.75,9.45 9.8,9.4 | 7.15,9.4 7.6,9.4 | C12.2 v19.1,15.25 | C14.2 v154.05,15.35 | C13.2 v96.55,15.25
  Bottom 0.406: 7.6,9.4 9.8,9.4 11.6,9.4 14.6,9.4 17.2,9.4 19.9,9.4 22.1,9.4 | 22.1,9.4 22.3,9.4 24.7,9.4 26.2,9.4 | 26.2,9.4 27.5,9.4 29.4,9.4 32.7,9.4 35.3,9.4 37.8,9.4 40.2,9.4 43.1,9.4 45.8,9.4 48.3,9.4 51,9.4 53.6,9.4 56.1,9.4 58.5,9.4 61.2,9.4 64,9.4 66.7,9.4 69.3,9.4 71.5,9.4 75.4,9.4 77.1,9.4 79.5,9.4 81.3,9.4 85.4,9.4 87.7,9.4 89.8,9.4 92.7,9.4 95.9,9.4 97.3,9.4 101.2,9.4 103.8,9.4 105.3,9.4 109.1,9.4 110.6,9.4 113.5,9.4 116.1,9.4 118.5,9.4 121.4,9.4 124,9.4 127.2,9.4 130,9.4 132.7,9.4 135.3,9.4 138,9.4 140.2,9.4 142.7,9.4 145.7,9.4 148,9.4 150.15,9.4 153.3,9.4 156.2,9.4 158.9,9.4 161.2,9.4 163.8,9.4 166.2,9.4 169,9.4 171.3,9.4 174.4,9.4 176.5,9.4 179.1,9.4 182.2,9.4 184.3,9.4 187,9.4 189.3,9.4 191.2,9.4 | v26.2,7.5 26.2,9.4 | v22,6.4 22,9.3 22.1,9.4
  other vias: 60.9,16.8 60.9,15 62.2,15 48.1,14.9 51.6,14.9 54.8,14.9 48.2,7.9 51.8,7.9 54.8,7.9
  pour GND (isolate 0.254, no thermals): 7.7,22.6 195.2,22.6 195.2,0 7.7,0
  pour Bottom (isolate 0.254, rank 2): 7.5,12.6 7.5,8.8 38.2,8.8 38.2,7.7 41.5,7.7 41.5,8.8 47.7,8.8 47.7,7.4 55.2,7.4 55.2,8.8 59.8,8.8 59.8,5.6 63.5,5.6 63.5,8.8 138,8.8 138,5.5 141.5,5.5 141.5,8.8 193,8.8 193,12.6
  pour Top (isolate 0.254, rank 3, no thermals): 125.4,18.7 125.4,4 151.8,4 151.8,18.7
  pour Top (isolate 0.254, rank 2, no thermals): 60.2,17.8 60.2,11.5 58.9,11.5 58.9,9.2 60.2,9.2 60.2,5.9 64.3,5.9 64.3,17.8
  pour Top (isolate 0.254, no thermals): 47,16 47,6.7 56.3,6.7 56.3,16
N$1
  Top 2: D2.1 D5.2
N$2
  Top 2: D4.2 D3.1
N$3
  Top 0.254: U3.3 62.65,11.96 63.4,11.2 R15.2
N$4
  Top 0.254: U1.51 44.75,14.1 44.1,13.45 R9.1
N$5
  Top 0.254: U4.P$3 11.96,2.24 12.9,1.3 20.9,1.3 22.2,2.6 R4.2
N$6  (via drill 0.35)
  Top 0.254: U$74.5 144.7,8.8 v143.9,8 | R16.1 142.3,17.15 v142.3,14.7
  GND 0.254: v142.3,14.7 143.9,13.1 v143.9,8
N$7
  Bottom 0.254: U5.2 U6.5
N$8
  Bottom 0.406: U5.3 U6.4
N$9
  Bottom 0.254: U2.2 U5.5
N$10
  Bottom 0.406: U2.3 U5.4
N$11
  Bottom 0.254: U6.2 U7.5
N$12  (via drill 0.35)
  Top 0.254: U1.16 55.4,3.9 v54.5,3
  Bottom 0.254: v54.5,3 54,2.5 35,2.5 33.33,4.17 JP1.3
N$13  (via drill 0.35)
  Top 0.254: v54.5,4.1 54.9,4.5 U1.15
  Bottom 0.254: JP1.2 30.79,4.21 33.3,1.7 54.6,1.7 55.3,2.4 55.3,3.5 54.7,4.1 v54.5,4.1
N$14
  Top 0.254: U1.9 51.9,3 51.4,2.5 43.14,2.5 JP1.6
  Bottom 0.254: R1.2 40.99,4.65 JP1.6
N$15
  Bottom 0.254: U26.2 U27.5
N$16
  Bottom 0.406: U6.3 U7.4
N$17
  Bottom 0.254: U7.2 U8.5
N$18
  Bottom 0.406: U7.3 U8.4
N$19
  Top 0.254: U1.50 45,14.6 44.7,14.9 44.7,15.9 44.3,16.3 32.85,16.3 28.7,12.15 R3.1
N$20
  Bottom 0.254: U8.2 U9.5
N$21
  Top 0.254: U1.48 47.9,18.4 47.2,19.1 R6.1
N$24
  Bottom 0.406: U8.3 U9.4
N$25
  Bottom 0.254: U9.2 U10.5
N$27
  Bottom 0.406: U9.3 U10.4
N$28
  Bottom 0.254: U10.2 U11.5
N$29
  Bottom 0.406: U10.3 U11.4
N$30
  Bottom 0.254: U11.2 U12.5
N$31
  Bottom 0.406: U11.3 U12.4
N$32
  Bottom 0.254: U12.2 U13.5
N$33
  Bottom 0.406: U12.3 U13.4
N$34
  Bottom 0.254: U13.2 U14.5
N$35
  Bottom 0.406: U13.3 U14.4
N$36
  Bottom 0.254: U14.2 U15.5
N$37
  Bottom 0.406: U14.3 U15.4
N$38
  Bottom 0.254: U15.2 U17.5
N$39
  Bottom 0.406: U15.3 U17.4
N$40
  Bottom 0.254: U17.2 U16.5
N$41
  Bottom 0.406: U17.3 U16.4
N$42
  Bottom 0.254: U18.2 U19.5
N$43
  Bottom 0.406: U18.3 U19.4
N$44
  Bottom 0.254: U16.2 U18.5
N$45
  Top 0.254: U1.49 45.95,16.25 46.55,16.85 R5.1
N$46
  Bottom 0.406: U16.3 U18.4
N$47
  Bottom 0.254: U19.2 U20.5
N$48
  Bottom 0.406: U19.3 U20.4
N$49
  Bottom 0.254: U20.2 U21.5
N$50  (via drill 0.35)
  Top 0.254: U1.30 58.4,14.1 58.7,14.4 58.7,15.7 57.8,16.6 57.8,17.6 58.95,18.75 R2.2
  Top 0.406: R2.2 59.85,19.4 v60.3,19.4
  Bottom 0.406: v60.3,19.4 62.09,21.19 188.31,21.19 193.04,16.46 JP2.3
N$51
  Bottom 0.406: U20.3 U21.4
N$52
  Bottom 0.254: U21.2 U22.5
N$53
  Bottom 0.406: U21.3 U22.4
N$54
  Bottom 0.254: U22.2 U23.5
N$55
  Bottom 0.406: U22.3 U23.4
N$56
  Bottom 0.254: U23.2 U24.5
N$57
  Bottom 0.406: U23.3 U24.4
N$58
  Bottom 0.254: U24.2 U25.5
N$59
  Bottom 0.406: U24.3 U25.4
N$60
  Bottom 0.254: U25.2 U26.5
N$61
  Bottom 0.406: U25.3 U26.4
N$62
  Top 0.406: U3.5 C20.1 64.55,7.45 62.3,5.2 FB1.1
N$63
  Bottom 0.406: U26.3 U27.4
N$64
  Bottom 0.254: U27.2 U28.5
N$65
  Bottom 0.406: U27.3 U28.4
N$66
  Bottom 0.254: U28.2 U30.5
N$67
  Bottom 0.406: U28.3 U30.4
N$68
  Bottom 0.254: U29.5 U30.2
N$69
  Bottom 0.406: U30.3 U29.4
N$70
  Bottom 0.254: U31.2 U32.5
N$71
  Bottom 0.406: U31.3 U32.4
N$72
  Bottom 0.254: U29.2 U31.5
N$73
  Bottom 0.406: U29.3 U31.4
N$74
  Bottom 0.254: U32.2 U33.5
N$75
  Bottom 0.406: U32.3 U33.4
N$76
  Bottom 0.254: U33.2 U34.5
N$77
  Bottom 0.406: U33.3 U34.4
N$78
  Bottom 0.254: U34.2 U35.5
N$79
  Bottom 0.406: U34.3 U35.4
N$80
  Bottom 0.254: U35.2 U36.5
N$81
  Bottom 0.406: U35.3 U36.4
N$82
  Bottom 0.254: U36.2 U37.5
N$83
  Bottom 0.406: U36.3 U37.4
N$84
  Bottom 0.254: U38.5 U37.2
N$85
  Bottom 0.406: U37.3 U38.4
N$86
  Bottom 0.254: U38.2 U39.5
N$87
  Bottom 0.406: U38.3 U39.4
N$88
  Bottom 0.254: U39.2 U40.5
N$89
  Bottom 0.406: U39.3 U40.4
N$90
  Bottom 0.254: U40.2 U41.5
N$91
  Bottom 0.406: U40.3 U41.4
N$93
  Bottom 0.254: U41.2 U43.5
N$94
  Bottom 0.406: U41.3 U43.4
N$95
  Bottom 0.254: U43.2 U42.5
N$96
  Bottom 0.406: U43.3 U42.4
N$97
  Bottom 0.254: U44.2 U45.5
N$98
  Bottom 0.406: U44.3 U45.4
N$99
  Bottom 0.254: U42.2 U44.5
N$100
  Bottom 0.406: U42.3 U44.4
N$101
  Bottom 0.254: U45.2 U46.5
N$102
  Bottom 0.406: U45.3 U46.4
N$103
  Bottom 0.254: U46.2 U47.5
N$104
  Bottom 0.406: U46.3 U47.4
N$105
  Bottom 0.254: U47.2 U48.5
N$106
  Bottom 0.406: U47.3 U48.4
N$107
  Bottom 0.254: U49.5 U48.2
N$108
  Bottom 0.406: U48.3 U49.4
N$109
  Bottom 0.254: U49.2 U50.5
N$110
  Bottom 0.406: U49.3 U50.4
N$111
  Bottom 0.254: U50.2 U51.5
N$113
  Bottom 0.406: U50.3 U51.4
N$114
  Bottom 0.254: U51.2 U52.5
N$115
  Bottom 0.406: U51.3 U52.4
N$116
  Bottom 0.254: U52.2 U53.5
N$117
  Bottom 0.406: U52.3 U53.4
N$118
  Bottom 0.254: U53.2 U54.5
N$119
  Bottom 0.406: U53.3 U54.4
N$120
  Bottom 0.254: U54.2 U56.5
N$121
  Bottom 0.406: U54.3 U56.4
N$122
  Bottom 0.254: U56.2 U55.5
N$123
  Bottom 0.406: U56.3 U55.4
N$124
  Bottom 0.254: U57.2 U58.5
N$125
  Bottom 0.406: U57.3 U58.4
N$126
  Bottom 0.254: U55.2 U57.5
N$127
  Bottom 0.406: U55.3 U57.4
N$128
  Bottom 0.254: U58.2 U59.5
N$129
  Top 0.508: U$74.2 L2.2 145.6,14.5 146.7,13.4 C16.1
N$130
  Top 0.508: U$74.6 146.63,10.12 C16.2
N$131
  Bottom 0.406: U58.3 U59.4
N$132
  Bottom 0.254: U59.2 U60.5
N$133
  Bottom 0.406: U59.3 U60.4
N$134
  Bottom 0.254: U61.5 U60.2
N$135
  Bottom 0.406: U60.3 U61.4
N$136
  Bottom 0.254: U61.2 U62.5
N$137
  Bottom 0.406: U61.3 U62.4
N$138
  Bottom 0.254: U62.2 U63.5
N$139
  Bottom 0.406: U62.3 U63.4
N$140
  Bottom 0.254: U63.2 U64.5
N$141
  Bottom 0.406: U63.3 U64.4
N$142
  Bottom 0.254: U64.2 U65.5
N$143
  Bottom 0.406: U64.3 U65.4
N$144
  Bottom 0.254: U65.2 U66.5
N$145
  Bottom 0.406: U66.4 U65.3
N$146
  Bottom 0.254: U66.2 U67.5
N$147
  Bottom 0.406: U66.3 U67.4
N$148
  Bottom 0.254: U67.2 U69.5
N$149
  Bottom 0.406: U67.3 U69.4
N$150
  Bottom 0.254: U69.2 U68.5
N$151
  Bottom 0.406: U69.3 U68.4
N$152
  Bottom 0.254: U70.2 U71.5
N$153
  Bottom 0.406: U70.3 U71.4
N$154
  Bottom 0.254: U68.2 U70.5
N$155
  Bottom 0.406: U68.3 U70.4
N$156
  Bottom 0.254: U71.2 U72.5
N$157
  Bottom 0.406: U71.3 U72.4
N$158
  Bottom 0.254: U72.2 U73.5
N$159
  Bottom 0.406: U72.3 U73.4
N$160
  Bottom 0.254: U73.2 U74.5
N$161
  Bottom 0.406: U73.3 U74.4
N$162
  Bottom 0.254: U74.2 U75.5
N$163
  Bottom 0.406: U74.3 U75.4
N$164
  Bottom 0.254: U75.2 U76.5
N$165
  Bottom 0.406: U75.3 U76.4
N$167
  Top 0.508: R11.1 143.72,10.15 U$74.4
N$168
  Top 0.508: R13.2 142.55,8.5 R11.2 142.5,7.1 144.75,7.1 R12.1
SDI_1  (via drill 0.35)
  Top 0.254: v43.5,19 43.6,19.1 R6.2
  Bottom 0.254: U2.4 2.6,10.4 1.7,11.3 1.7,13.6 4.4,16.3 11.7,16.3 14.4,19 v43.5,19